# Altium PCB BoostConverter.PcbDoc
Units mm, origin at the board's own origin, x right, y up, seen from the top; angles counter-clockwise.
Board outline 62.5 x 35 mm, 2 copper layers (Top Layer, Bottom Layer), stack 1.571 mm thick; 12 components, 7 nets, 33 pads, 71 vias.
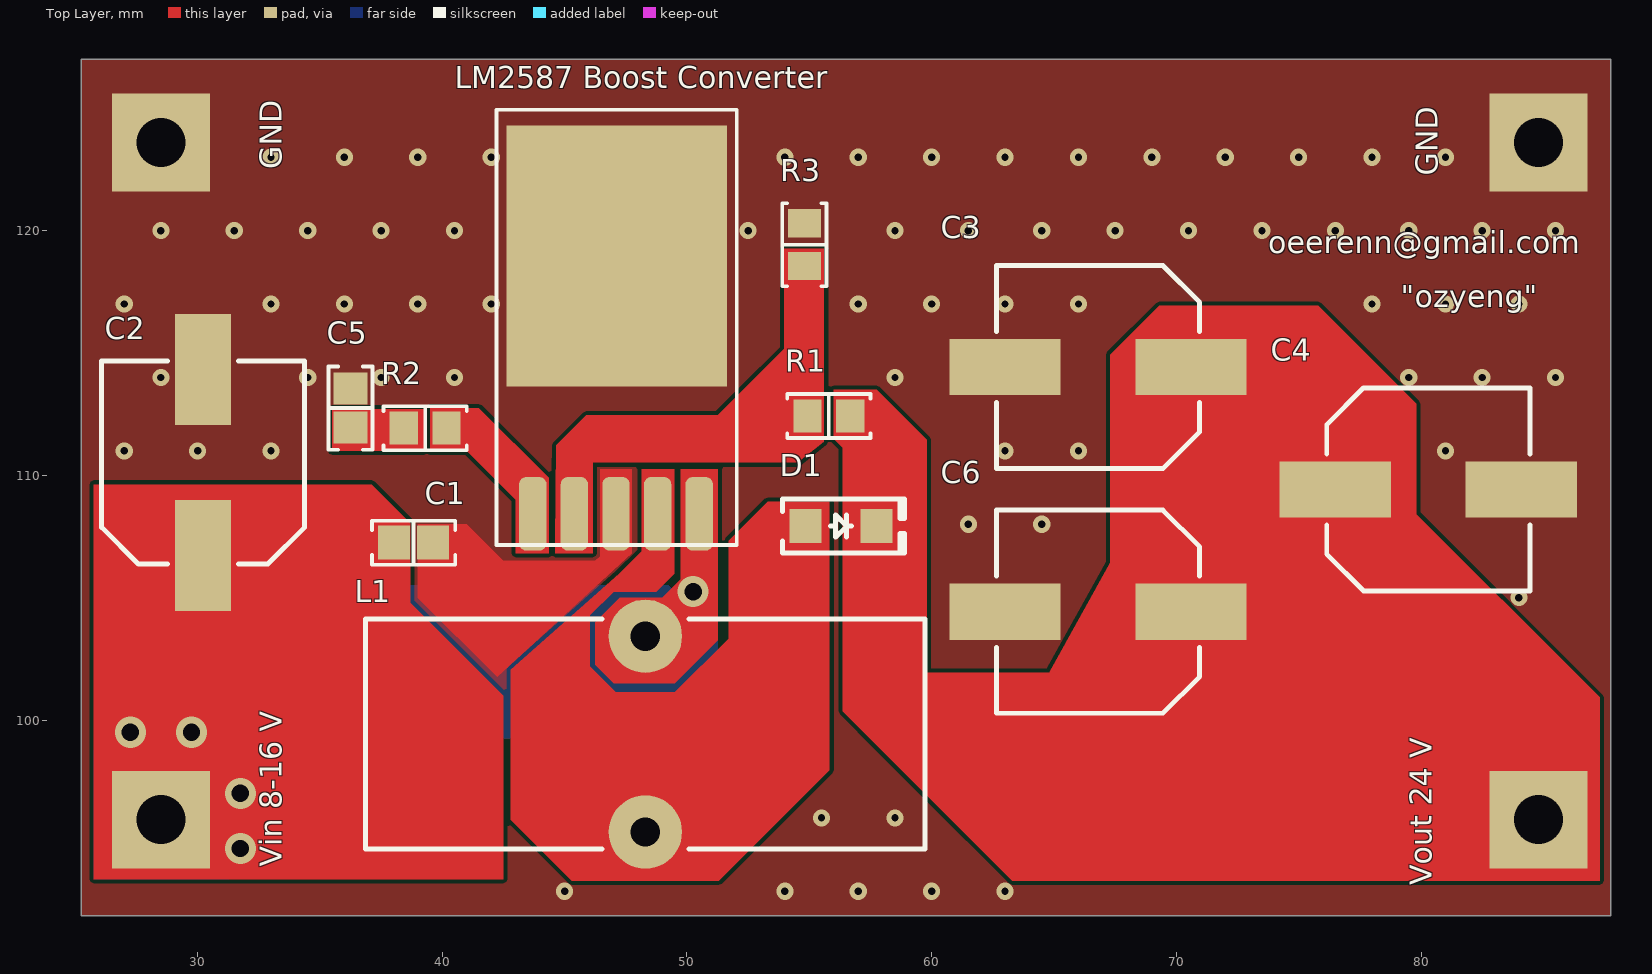
[diagram p0: Top Layer view]
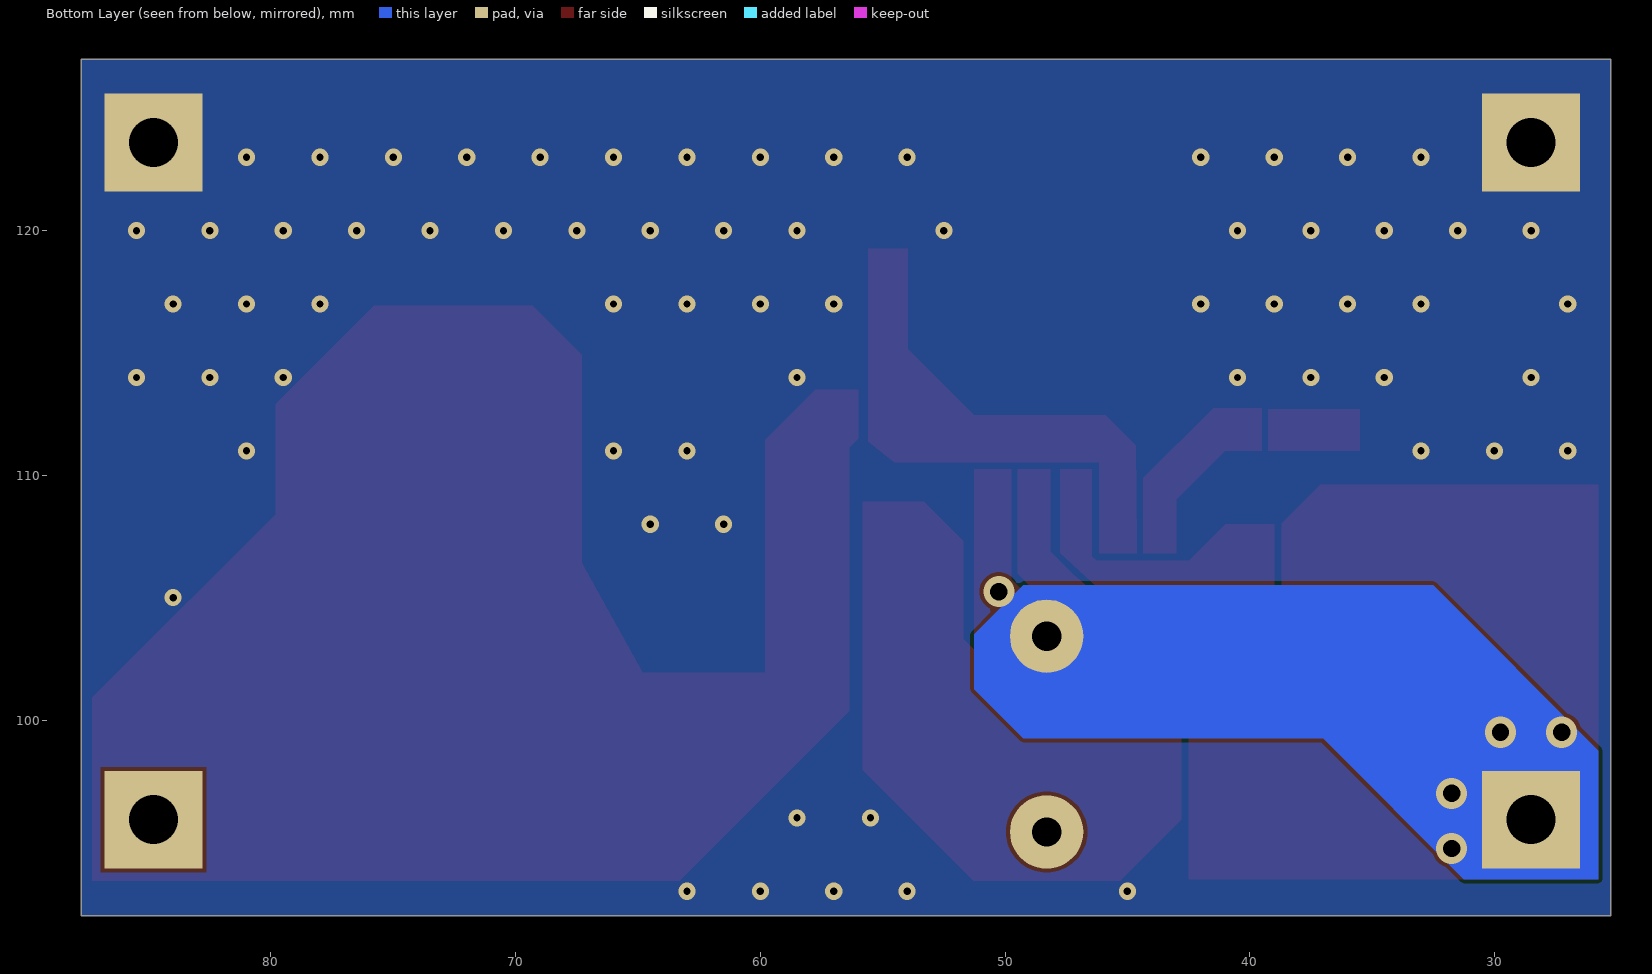
[diagram p1: Bottom Layer view, seen from below]
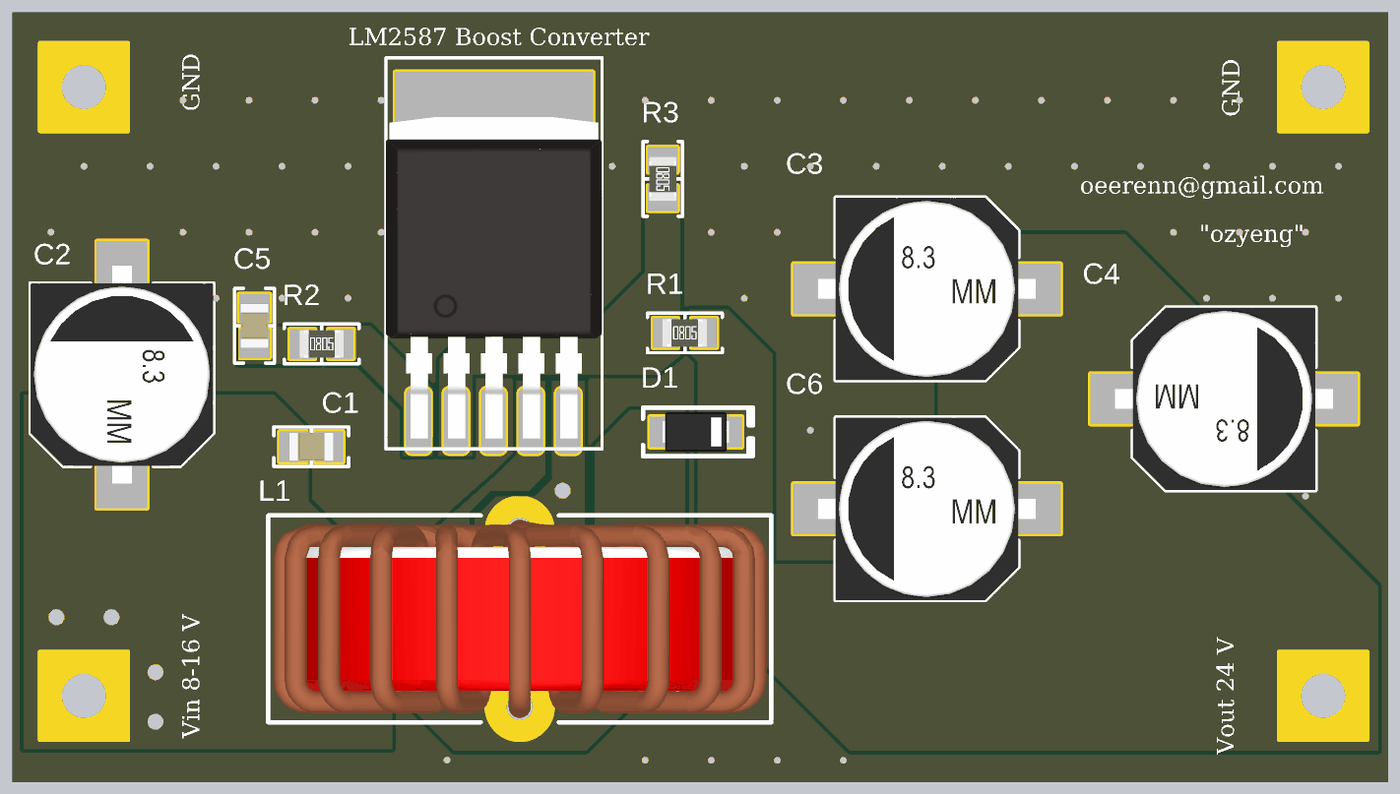
[diagram p2: 3D render of the assembled board from above, using the file's embedded part models]

## Layer stack, top to bottom
Top Solder: solder mask 0.0102, Solder Resist, Dk 3.5
Top Layer: signal copper 0.0356
Dielectric 1: dielectric 1.5, FR-4, Dk 4.8
Bottom Layer: signal copper 0.0356
Bottom Solder: solder mask 0.0102, Solder Resist, Dk 3.5

## Board outline
25.25,92 25.25,127 87.75,127 87.75,92

## Design rules (kind name [scope] priority, off if disabled: settings)
Clearance [All] p1: gap=0.152 ignorepadtopadclearanceinfootprint=FALSE
PolygonConnect [All] p1: connectstyle=Direct reliefconductorwidth=0.254 reliefentries=4 polygonreliefangle="90 Angle" airgapwidth=0.254
RoutingVias [All] p1: holewidth=0.5 width=0.8 viastyle="Through Hole" minholewidth=0.3 minwidth=0.5 maxholewidth=1 maxwidth=2
SolderMaskExpansion [All] p1: expansion=0.102 istentingtop=FALSE
Width [All] p1: maxlimit=3 minlimit=0.254 preferedwidth=0.5
30 further rules are at their usual default settings.

## Classes and differential pairs
component class BoostConverter: C1 C2 C5 D1 L1 R1 R2 R3

## Components (designator, comment, footprint, x,y, rotation, side; value= is the part's Value field where it differs from the comment)
C1 "0.1µF" "CAP 0805_2012" 38.825,107.25 r0 top
C2 "100µF" "CAP ALSMD 8.3MM H10.5MM" 30.225,110.525 r90 top
C3 "330µF" "CAP ALSMD 8.3MM H10.5MM" 66.8,114.425 r180 top
C4 "330µF" "CAP ALSMD 8.3MM H10.5MM" 80.3,109.425 r0 top
C5 "0.68µF" "CAP 0805_2012" 36.25,112.75 r270 top
C6 "330µF" "CAP ALSMD 8.3MM H10.5MM" 66.8,104.425 r180 top
D1 "SS24L RVG" "SMF DO-219AB" 56.3,107.925 r0 top
L1 "33 uF" 7447070 48.3,99.425 r0 top
R1 "36.5 kOhms" "RES 0805_2012" 55.8,112.425 r0 top
R2 "3 kOhms" "RES 0805_2012" 39.3,111.925 r0 top
R3 "2 kOhms" "RES 0805_2012" 54.8,119.425 r270 top
? "LM2587" D2PAK 47.129,117.188 r0 top

## Footprints (in the part's own frame and the unit in brackets; to place one, negate y for a bottom-side part, rotate by r counter-clockwise, add the part's x,y. Pads: shape width x height; smd on the part's side, far side on the other; paste and mask are expansions set on the pad)
7447070 [mm] "FIXED IND 100UH 5A 35 MOHM TH  0.984\" Dia x 0.433\" W (25.00mm x 11.00mm)"
  round 3 hole 1.2: 1(0,4) 2(0,-4)
  silkscreen extent -11.43,-4.7 11.43,4.7, body extent -11.21,-4.5 11.21,4.5, height 23.21
"CAP 0805_2012" [mm] "Chip Capacitor, 2-Leads, Body 2.00x1.20mm, IPC Medium Density"
  rect 1.3x1.4 smd: 1(-0.8,0) 2(0.8,0)
  silkscreen extent -1.7,-0.9 1.7,0.9, body extent -1,-0.64 1,0.64, height 1.26
"CAP ALSMD 8.3MM H10.5MM" [mm] "Aluminum Electrolytic Capacitor, Body 8.30x8.30x10.50mm, IPC Low Density"
  rect 4.55x2.3 smd: 1(-3.8,0) 2(3.8,0)
  silkscreen extent -4.15,-4.15 4.15,4.15, body extent -4.95,-4.15 4.95,4.15, height 10.5
D2PAK [mm]
  rrect50% 1.12x3 smd: 1(-3.429,-8.763) 1(-3.429,-8.763) 2(-1.729,-8.763) 3(-0.029,-8.763) 4(1.671,-8.763) 5(3.371,-8.763)
  rect 9x10.66 smd: 3(0,1.778)
  silkscreen extent -4.91,-10.03 4.91,7.75, body extent -4.91,-9.56 4.91,5.04, height 4.22
"RES 0805_2012" [mm] "Chip Resistor, 2-Leads, Body 2.00x1.25mm, IPC Medium Density"
  rect 1.15x1.35 smd: 1(-0.875,0) 2(0.875,0)
  silkscreen extent -1.7,-0.9 1.7,0.9, body extent -1,-0.62 1,0.63, height 0.6
"SMF DO-219AB" [mm] "Molded Diode, 2-Leads, Body 3.90x1.90mm, IPC Medium Density"
  rect 1.3x1.4 smd paste+0: 1(-1.45,0)
  rect 1.3x1.4 smd: 2(1.45,0)
  silkscreen extent -2.4,-1.1 2.59,1.1, body extent -1.5,-0.9 1.5,0.9, height 1.18

## Part data
C1: library part 0805Y0250104KXT, "CAP CER 0.1UF 25V X7R 0805", Device Package="0805 (2012 Metric)", Manufacturer="Knowles Syfer", Operating Temperature="-55°C ~ 125°C", Supplier Part Number 1=1608-1010-1-ND, Temperature Coefficient=X7R, Tolerance=±10%, Voltage - Rated=25V, Applications="Boardflex Sensitive", Capacitance=0.1µF, ComponentLink1Description=Datasheet, ComponentLink1URL=https://www.knowlescapacitors.com/getattachment/2dbfc8bc-e2b3-4b4d-afb1-43b011b9ebe0/High-Std-Voltage.aspx, ComponentLink2Description="DigiKey Link", ComponentLink2URL=http://digikey.com/product-detail/en/knowles-syfer/0805Y0250104KXT/1608-1010-1-ND/5730209, Features="Soft Termination", LastUpdated="2.09.2020 01:04:40", Lifecycle Status=Active, Minimum Order=1, Mounting Type="Surface Mount, MLCC", Package / Case="0805 (2012 Metric)", Packaging=TapeAndReel, Part Number=0805Y0250104KXT, Part Status=Active, PartId=3471, Price=0.16, Series=FlexiCap™, Size / Dimension="0.079\" L x 0.049\" W (2.00mm x 1.25mm)", Supplier 1=DigiKey, Thickness (Max)="0.051\" (1.30mm)"
C2: library part UUR1V101MNL1GS, "CAP ALUM 100UF 20% 35V SMD", Device Package="Radial, Can - SMD", Lifetime @ Temp.="2000 Hrs @ 85°C", Manufacturer=Nichicon, Operating Temperature="-40°C ~ 85°C", Ripple Current @ High Frequency="227.5mA @ 10kHz", Ripple Current @ Low Frequency="175mA @ 120Hz", Supplier Part Number 1=493-6237-1-ND, Tolerance=±20%, Voltage - Rated=35V, Applications="General Purpose", Capacitance=100µF, ComponentLink1Description=Datasheet, ComponentLink1URL=http://nichicon-us.com/english/products/pdfs/e-uur.pdf, ComponentLink2Description="DigiKey Link", ComponentLink2URL=http://digikey.com/product-detail/en/nichicon/UUR1V101MNL1GS/493-6237-1-ND/3438750, Height - Seated (Max)="0.413\" (10.50mm)", LastUpdated="2.09.2020 01:25:15", Lifecycle Status=Active, Minimum Order=1, Mounting Type="Surface Mount", Package / Case="Radial, Can - SMD", Packaging=TapeAndReel, Part Number=UUR1V101MNL1GS, Part Status=Active, PartId=7563, Price=0.18, Series=UUR, Size / Dimension="0.315\" Dia (8.00mm)", Supplier 1=DigiKey, Surface Mount Land Size="0.327\" L x 0.327\" W (8.30mm x 8.30mm)"
C3 C4 C6: library part 25TLV330M8X10.5, "CAP ALUM 330UF 20% 25V SMD", Device Package="Radial, Can - SMD", Lifetime @ Temp.="5000 Hrs @ 105°C", Manufacturer=Rubycon, Operating Temperature="-55°C ~ 105°C", Ratings=AEC-Q200, Ripple Current @ High Frequency="600mA @ 100kHz", Ripple Current @ Low Frequency="360mA @ 120Hz", Supplier Part Number 1=1189-2096-1-ND, Tolerance=±20%, Voltage - Rated=25V, Applications=Automotive, Capacitance=330µF, ComponentLink1Description=Datasheet, ComponentLink1URL=http://www.rubycon.co.jp/en/catalog/e_pdfs/aluminum/e_TLV.pdf, ComponentLink2Description="DigiKey Link", ComponentLink2URL=http://digikey.com/product-detail/en/rubycon/25TLV330M8X10.5/1189-2096-1-ND/3987015, Height - Seated (Max)="0.413\" (10.50mm)", LastUpdated="2.09.2020 01:25:15", Lifecycle Status=Active, Minimum Order=1, Mounting Type="Surface Mount", Package / Case="Radial, Can - SMD", Packaging=TapeAndReel, Part Number=25TLV330M8X10.5, Part Status=Active, PartId=7519, Polarization=Polar, Price=0.27, Series=TLV, Size / Dimension="0.315\" Dia (8.00mm)", Supplier 1=DigiKey, Surface Mount Land Size="0.327\" L x 0.327\" W (8.30mm x 8.30mm)", Impedance="160 mOhms"
C5: library part CL21B684JOFNNNE, "CAP CER 0.68UF 16V X7R 0805", Device Package="0805 (2012 Metric)", Manufacturer="Samsung Electro-Mechanics", Operating Temperature="-55°C ~ 125°C", Supplier Part Number 1=1276-2976-1-ND, Temperature Coefficient=X7R, Tolerance=±5%, Voltage - Rated=16V, Applications="General Purpose", Capacitance=0.68µF, ComponentLink1Description=Datasheet, ComponentLink1URL=http://www.samsungsem.com/kr/support/product-search/mlcc/CL21B684JOFNNNE.jsp, ComponentLink2Description="DigiKey Link", ComponentLink2URL=http://digikey.com/product-detail/en/samsung-electro-mechanics/CL21B684JOFNNNE/1276-2976-1-ND/3891062, LastUpdated="2.09.2020 01:04:40", Lifecycle Status=Active, Minimum Order=1, Mounting Type="Surface Mount, MLCC", Package / Case="0805 (2012 Metric)", Packaging=TapeAndReel, Part Number=CL21B684JOFNNNE, Part Status=Active, PartId=3245, Price=0.03, Series=CL, Size / Dimension="0.079\" L x 0.049\" W (2.00mm x 1.25mm)", Supplier 1=DigiKey, Thickness (Max)="0.053\" (1.35mm)"
D1: "DIODE SCHOTTKY 40V 2A SUB SMA", Current - Average Rectified (Io)=2A, Current - Reverse Leakage @ Vr="400µA @ 40V", Manufacturer="Taiwan Semiconductor Corporation", Operating Temperature - Junction="-55°C ~ 125°C", Package / Case=DO-219AB, Supplier Device Package="Sub SMA", Supplier Part Number 1=SS24LRVGCT-ND, Voltage - DC Reverse (Vr) (Max)=40V, Voltage - Forward (Vf) (Max) @ If="500mV @ 2A", ComponentLink1Description=Datasheet, ComponentLink1URL=https://www.taiwansemi.com/products/datasheet/SS22L%20SERIES_N15.pdf, ComponentLink2Description="DigiKey Link", ComponentLink2URL=http://digikey.com/product-detail/en/taiwan-semiconductor-corporation/SS24L-RVG/SS24LRVGCT-ND/7359547, Diode Type=Schottky, LastUpdated="2.09.2020 01:23:14", Lifecycle Status=Active, Minimum Order=1, Mounting Type="Surface Mount", Packaging=TapeAndReel, Part Number="SS24L RVG", Part Status=Active, PartId=1290, Price=0.09, Series=-, Speed="Fast Recovery =< 500ns, > 200mA (Io)", Supplier 1=DigiKey
L1: library part CustomInductor
R1: library part RN73C2A36K5BTDF, "RES SMD 36.5KOHM 0.1% 1/10W 0805", Device Package="0805 (2012 Metric)", Manufacturer="TE Connectivity Passive Product", Operating Temperature="-55°C ~ 155°C", Power (Watts)="0.1W, 1/10W", Supplier Device Package=0805, Supplier Part Number 1=A103421CT-ND, Temperature Coefficient=±10ppm/°C, Tolerance=±0.1%, ComponentLink1Description=Datasheet, ComponentLink1URL=https://www.te.com/commerce/DocumentDelivery/DDEController?Action=srchrtrv&DocNm=1773270&DocType=DS&DocLang=English, ComponentLink2Description="DigiKey Link", ComponentLink2URL=http://digikey.com/product-detail/en/te-connectivity-passive-product/RN73C2A36K5BTDF/A103421CT-ND/2730636, Composition="Thin Film", Height - Seated (Max)="0.026\" (0.65mm)", LastUpdated="2.09.2020 01:15:15", Lifecycle Status=Active, Minimum Order=1, Number of Terminations=2, Package / Case="0805 (2012 Metric)", Packaging=TapeAndReel, Part Number=RN73C2A36K5BTDF, Part Status=Active, PartId=32001, Price=0.37, Resistance="36.5 kOhms", Series="RN73, Holsworthy", Size / Dimension="0.079\" L x 0.049\" W (2.00mm x 1.25mm)", Supplier 1=DigiKey
R2: library part RT0805DRD073KL, "RES SMD 3K OHM 0.5% 1/8W 0805", Device Package="0805 (2012 Metric)", Manufacturer=Yageo, Operating Temperature="-55°C ~ 155°C", Power (Watts)="0.125W, 1/8W", Supplier Device Package=0805, Supplier Part Number 1=311-2744-1-ND, Temperature Coefficient=±25ppm/°C, Tolerance=±0.5%, ComponentLink1Description=Datasheet, ComponentLink1URL=https://www.yageo.com/upload/media/product/productsearch/datasheet/rchip/PYu-RT_1-to-0.01_RoHS_L_11.pdf, ComponentLink2Description="DigiKey Link", ComponentLink2URL=http://digikey.com/product-detail/en/yageo/RT0805DRD073KL/311-2744-1-ND/6129163, Composition="Thin Film", Height - Seated (Max)="0.024\" (0.60mm)", LastUpdated="2.09.2020 01:15:24", Lifecycle Status=Active, Minimum Order=1, Number of Terminations=2, Package / Case="0805 (2012 Metric)", Packaging=TapeAndReel, Part Number=RT0805DRD073KL, Part Status=Active, PartId=27799, Price=0.03, Resistance="3 kOhms", Series=RT, Size / Dimension="0.079\" L x 0.049\" W (2.00mm x 1.25mm)", Supplier 1=DigiKey
R3: library part RCS08052K00FKEA, "RES SMD 2K OHM 1% 0.4W 0805", Device Package="0805 (2012 Metric)", Manufacturer="Vishay Dale", Operating Temperature="-55°C ~ 155°C", Power (Watts)="0.4W, 2/5W", Ratings=AEC-Q200, Supplier Device Package=0805, Supplier Part Number 1=541-2840-1-ND, Temperature Coefficient=±100ppm/°C, Tolerance=±1%, ComponentLink1Description=Datasheet, ComponentLink1URL=http://www.vishay.com/docs/20065/rcse3.pdf, ComponentLink2Description="DigiKey Link", ComponentLink2URL=http://digikey.com/product-detail/en/vishay-dale/RCS08052K00FKEA/541-2840-1-ND/5867133, Composition="Thick Film", Features="Automotive AEC-Q200, Pulse Withstanding", Height - Seated (Max)="0.020\" (0.50mm)", LastUpdated="2.09.2020 01:15:24", Lifecycle Status=Active, Minimum Order=1, Number of Terminations=2, Package / Case="0805 (2012 Metric)", Packaging=TapeAndReel, Part Number=RCS08052K00FKEA, Part Status=Active, PartId=27786, Price=0.03, Resistance="2 kOhms", Series="RCS e3", Size / Dimension="0.079\" L x 0.049\" W (2.00mm x 1.25mm)", Supplier 1=DigiKey

## Free pads (board coordinates)
  rect 4x4 hole 2: GND(28.5,123.6) GND(84.8,123.6) Vin(28.5,95.925) Vout(84.8,95.925)

## Via types
v1: diameter 0.7, hole 0.3, Top Layer to Bottom Layer, tented both sides, 66 vias
v2: diameter 1.27, hole 0.711, Top Layer to Bottom Layer, tented both sides, 5 vias

## Nets (pads, with @x,y where several pads share a name; then routed paths per layer and width w, separated by ;. In a path a pad name is that pad's centre, name@x,y a point inside that pad or via, vN(x,y) a via of type N, cw(c..) or ccw(c..) an arc to the next point about the centre after c; other vN are vias at no path point)
+12: ?.5 C1.1 C2.1 L1.1 pad.Vin
  other v2: 31.75,94.75 31.75,97 27.25,99.5 29.75,99.5 50.25,105.25
GND: ?.3 C1.2 C2.2 C3.2 C4.2 C5.1 C6.2 pad.GND R3.1 | length 1.3
  Top Layer w0.5: C1.2@39.625,107.2 C1.2 ; ?.3@47.075,107.168 47.075,108.4 ?.3@47.1,108.425
  other v1: 45,93 54,93 57,93 60,93 63,93 55.5,96 58.5,96 84,105 61.5,108 64.5,108 27,111 30,111 33,111 63,111 66,111 81,111 28.5,114 34.5,114 37.5,114 40.5,114 58.5,114 79.5,114 82.5,114 85.5,114 27,117 33,117 36,117 39,117 42,117 57,117 60,117 63,117 66,117 78,117 81,117 84,117 28.5,120 31.5,120 34.5,120 37.5,120 40.5,120 52.5,120 58.5,120 61.5,120 64.5,120 67.5,120 70.5,120 73.5,120 76.5,120 79.5,120 82.5,120 85.5,120 33,123 36,123 39,123 42,123 54,123 57,123 60,123 63,123 66,123 69,123 72,123 75,123 78,123 81,123
Net_1: ?.1 R2.2
Net_2: ?.2 R1.1 R3.2
Net_4: ?.4 D1.1 L1.2
NetC5_2: C5.2 R2.1 | length 0.3
  Top Layer w0.5: C5.2@36.3,112.125 C5.2@36.4,112.025 ; R2.1@38.325,112.025 R2.1
VOUT: C3.1 C4.1 C6.1 D1.2 pad.Vout R1.2

## Polygon pours and split planes (outlines as drawn)
GND on Bottom Layer "GND_L02_P000" (solid, pour order 0): 25.25,127 87.75,127 87.75,92 25.25,92
GND on Top Layer "GND_L01_P002" (solid, pour order 2): 25.25,127 87.75,127 87.75,92 25.25,92

## Other copper
Top Layer:
  region net GND: 47.5,106.75 47.75,106.823 47.661,106.823 47.528,106.69
  region net Net_4: 48.15,110.25 49.475,110.25 49.475,105.975 48.75,105.25 47,105.25 46.025,104.275 46.025,102.2 47.1,101.125 49.5,101.125 51.7,103.325 51.7,107.325 53.3,108.925 55.825,108.925 55.825,97.95 51.3,93.425 45.3,93.425 42.8,95.925 42.8,102.05 47.225,105.975 47.5,106.25 48.15,106.9
  region net +12: 49.75,110.25 51.25,110.25 51.25,103.25 49.5,101.5 47,101.5 46.25,102.25 46.25,104 47.25,105 49,105 49.75,105.75
  region net GND: 46.45,110.25 47.75,110.25 47.75,106.823 42.238,101.762 39,105 39,108 41,108 42.5,106.5 46.25,106.5 46.45,106.7
  region net Net_1: 39.5,112.75 41.5,112.75 44.35,109.9 44.35,106.825 43,106.825 43,109 41,111 39.5,111
  region net Net_2: 55.6,119.25 55.6,119.1 55.6,113.5 52.3,113.5 53.975,115.175 53.975,119.25
  region net VOUT: 56,113.5 57.75,113.5 59.8,111.45 59.8,105.425 56.875,105.425 56.375,105.925 56.375,111.125 56,111.5
  region net NetC5_2: 35.5,112.7 39.25,112.7 39.25,111 35.5,111
  region net +12: 42.5,93.5 25.75,93.5 25.75,109.625 37.125,109.625 38.7,108.05 38.7,104.8 42.5,101
  region net Net_2: 44.625,107.25 44.622,106.825 46.15,106.825 46.15,107.1 46.15,110.525 54.525,110.525 55.6,111.381 55.6,113.5 52.3,113.5 51.25,112.45 45.875,112.45 44.65,111.225
  region net VOUT: 72.3,93.425 87.3,93.425 87.3,100.925 79.3,108.925
  region net VOUT: 67.3,106.425 67.3,114.925 69.3,116.925 75.8,116.925 79.8,112.925 79.8,100.925 72.3,93.425 66.8,93.425 66.8,99.925 64.8,101.925
  region net VOUT: 71.8,106.425 74.08,108.705 74.08,110.813
  region net VOUT: 67.3,103.925 67.3,106.425 71.8,106.425
  region net VOUT: 64.8,101.925 69.3,105.925 71.3,104.925 74.3,101.925
  region net VOUT: 59.8,101.925 64.8,101.925 66.8,99.925 66.8,93.425 64.3,93.425
  region net VOUT: 59.8,101.925 64.3,97.425 64.3,93.425 63.3,93.425 57.8,98.925
  region net VOUT: 56.375,105.925 56.375,100.35 59.8,96.925 59.8,105.425 59.3,105.925
Bottom Layer:
  region net +12: 25.75,93.5 25.75,98.75 32.5,105.5 49.25,105.5 51.25,103.5 51.25,101.25 49.25,99.25 37,99.25 31.25,93.5

## Silkscreen, mask and mechanical layers (free items; w line width, h text height)
Top Overlay:
  text "LM2587 Boost Converter" at 40.5,125.508 h1.52
  text "GND" at 33.742,122.501 h1.52 r90
  text "GND" at 80.992,122.251 h1.52 r90
  text "oeerenn@gmail.com" at 73.75,118.761 h1.52
  text "\"ozyeng\"" at 79.163,116.559 h1.52
  text "Vin 8-16 V" at 33.742,94 h1.52 r90
  text "Vout 24 V" at 80.742,93.25 h1.52 r90
Mechanical 15:
  the board outline again, w0.1